# Altium PCB TOP.PcbDoc
Units mil, origin at the board's own origin, x right, y up, seen from the top; angles counter-clockwise.
Board outline 6000 x 4000 mil, 2 copper layers (Top Layer, Bottom Layer); 74 components, 73 nets, 468 pads, 20 vias.
Unrouted connection lines stored in the file: 230.
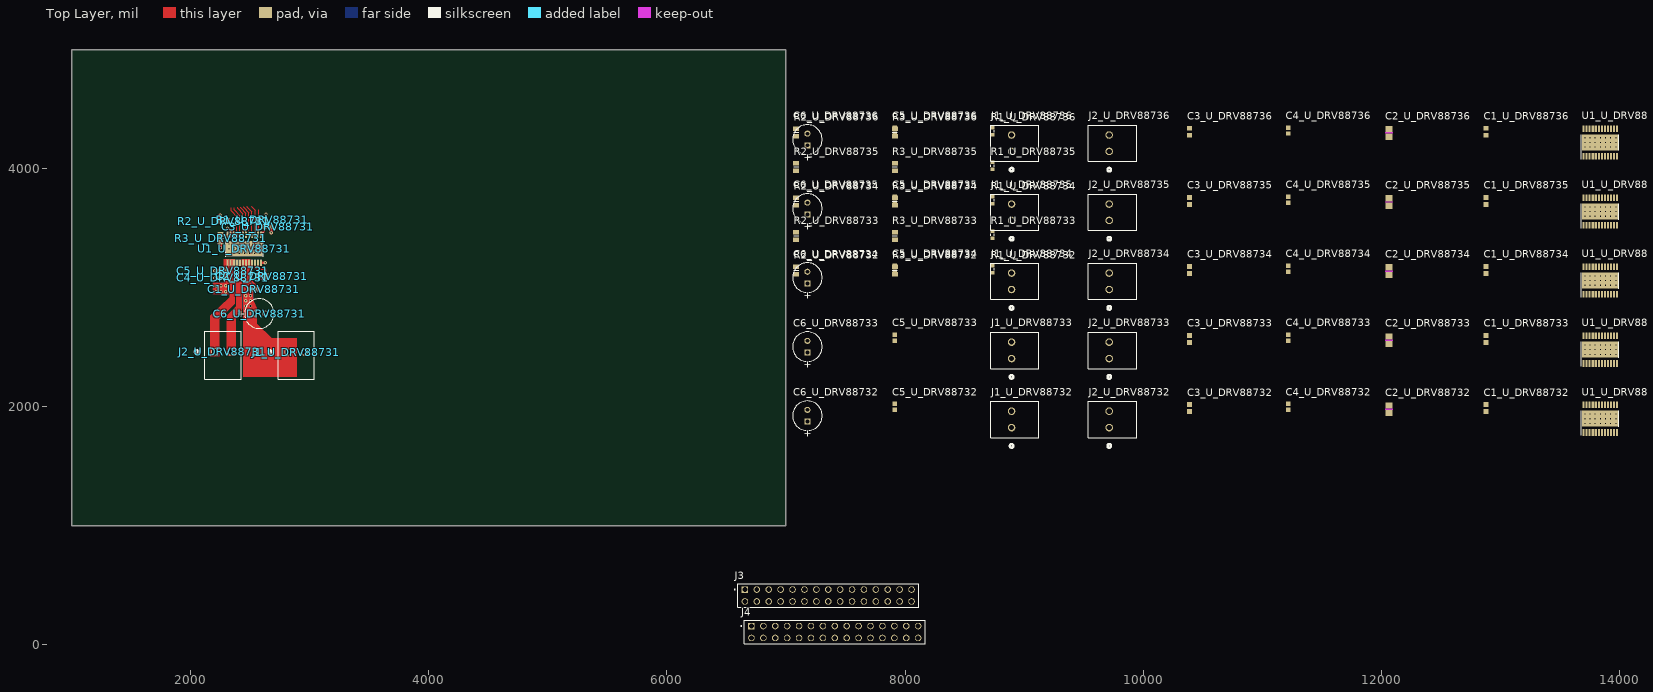
[diagram p0: Top Layer view]
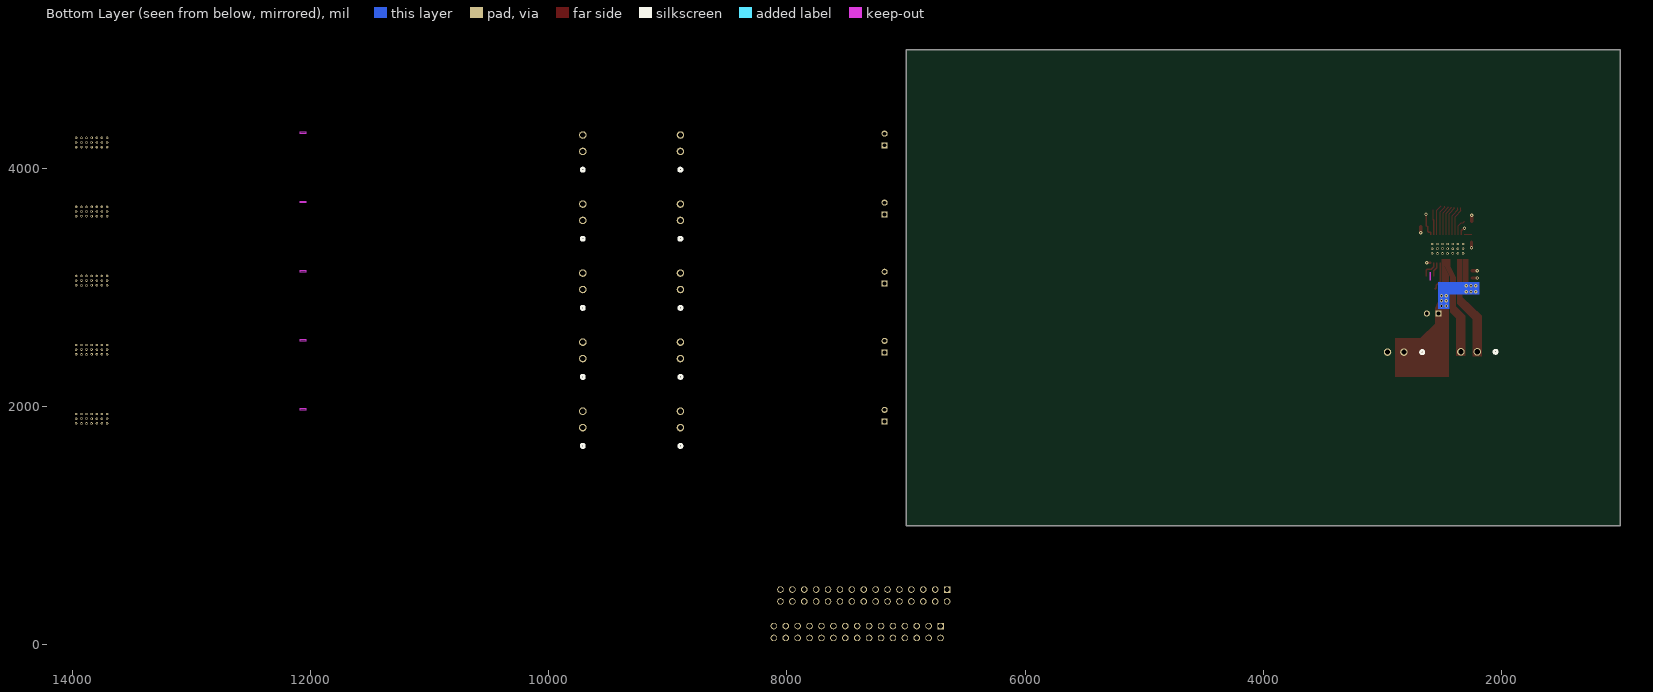
[diagram p1: Bottom Layer view, seen from below]

## Layer stack, top to bottom
Top Solder: solder mask 0.4, Solder Resist, Dk 3.5
Top Layer: signal copper 1.4
Dielectric 1: dielectric 12.6, FR-4, Dk 4.8
Bottom Layer: signal copper 1.4
Bottom Solder: solder mask 0.4, Solder Resist, Dk 3.5

## Board outline
1000,1000 7000,1000 7000,5000 1000,5000

## Design rules (kind name [scope] priority, off if disabled: settings)
Clearance [All] p1: gap=10 ignorepadtopadclearanceinfootprint=FALSE except(0: Arc-Hole Track-Hole SMDPad-Hole THPad-Hole Via-Hole Fill-Hole Poly-Hole Region-Hole Text-Hole)
PolygonConnect [All] p1: connectstyle=Relief reliefconductorwidth=10 reliefentries=4 polygonreliefangle="90 Angle" airgapwidth=10
RoutingVias [All] p1: holewidth=28 width=50 viastyle="Through Hole" minholewidth=28 minwidth=50 maxholewidth=28 maxwidth=50
SolderMaskExpansion [All] p1: expansion=4 istentingtop=FALSE
Width [All] p1: maxlimit=100 minlimit=10 preferedwidth=10 bottomlayer_maxwidth=10 minimp=50.000000 maximp=50.000000 favimp=50.000000
30 further rules are at their usual default settings.

## Classes and differential pairs
component class "Room Definition1": C1_U_DRV88731 C2_U_DRV88731 C3_U_DRV88731 C4_U_DRV88731 C5_U_DRV88731 C6_U_DRV88731 J1_U_DRV88731 J2_U_DRV88731 U1_U_DRV88731
channel class DRV8873: U_DRV88731 U_DRV88732 U_DRV88733 U_DRV88734 U_DRV88735 U_DRV88736
net class IPROPI2[1..6]: IPROPI21 IPROPI22 IPROPI23 IPROPI24 IPROPI25 IPROPI26
net class IPROPI1[1..6]: IPROPI11 IPROPI12 IPROPI13 IPROPI14 IPROPI15 IPROPI16
net class IN2[1..6]: IN21 IN22 IN23 IN24 IN25 IN26
net class IN1[1..6]: IN11 IN12 IN13 IN14 IN15 IN16
net class DISABLE[1..6]: DISABLE1 DISABLE2 DISABLE3 DISABLE4 DISABLE5 DISABLE6
net class C\S\[1..6]: C\S\1 C\S\2 C\S\3 C\S\4 C\S\5 C\S\6
component class U_DRV88736: C1_U_DRV88736 C2_U_DRV88736 C3_U_DRV88736 C4_U_DRV88736 C5_U_DRV88736 C6_U_DRV88736 J1_U_DRV88736 J2_U_DRV88736 R1_U_DRV88736 R2_U_DRV88736 R3_U_DRV88736 U1_U_DRV88736
component class U_DRV88735: C1_U_DRV88735 C2_U_DRV88735 C3_U_DRV88735 C4_U_DRV88735 C5_U_DRV88735 C6_U_DRV88735 J1_U_DRV88735 J2_U_DRV88735 R1_U_DRV88735 R2_U_DRV88735 R3_U_DRV88735 U1_U_DRV88735
component class U_DRV88734: C1_U_DRV88734 C2_U_DRV88734 C3_U_DRV88734 C4_U_DRV88734 C5_U_DRV88734 C6_U_DRV88734 J1_U_DRV88734 J2_U_DRV88734 R1_U_DRV88734 R2_U_DRV88734 R3_U_DRV88734 U1_U_DRV88734
component class U_DRV88733: C1_U_DRV88733 C2_U_DRV88733 C3_U_DRV88733 C4_U_DRV88733 C5_U_DRV88733 C6_U_DRV88733 J1_U_DRV88733 J2_U_DRV88733 R1_U_DRV88733 R2_U_DRV88733 R3_U_DRV88733 U1_U_DRV88733
component class U_DRV88732: C1_U_DRV88732 C2_U_DRV88732 C3_U_DRV88732 C4_U_DRV88732 C5_U_DRV88732 C6_U_DRV88732 J1_U_DRV88732 J2_U_DRV88732 R1_U_DRV88732 R2_U_DRV88732 R3_U_DRV88732 U1_U_DRV88732
component class U_DRV88731: C1_U_DRV88731 C2_U_DRV88731 C3_U_DRV88731 C4_U_DRV88731 C5_U_DRV88731 C6_U_DRV88731 J1_U_DRV88731 J2_U_DRV88731 R1_U_DRV88731 R2_U_DRV88731 R3_U_DRV88731 U1_U_DRV88731
component class TOP: J3 J4

## Components (designator, comment, footprint, x,y, rotation, side; value= is the part's Value field where it differs from the comment)
C1_U_DRV88731 "Capacitor 1 uF +/- 10% 16 V 0603" CAPC1608X94X35NL15T15 2531.43,2987 r180 top value=1µF (schematic designator C1)
C1_U_DRV88732 "Capacitor 1 uF +/- 10% 16 V 0603" CAPC1608X94X35NL15T15 12880,1990 r90 top value=1µF (schematic designator C1)
C1_U_DRV88733 "Capacitor 1 uF +/- 10% 16 V 0603" CAPC1608X94X35NL15T15 12880,2570 r90 top value=1µF (schematic designator C1)
C1_U_DRV88734 "Capacitor 1 uF +/- 10% 16 V 0603" CAPC1608X94X35NL15T15 12880,3150 r90 top value=1µF (schematic designator C1)
C1_U_DRV88735 "Capacitor 1 uF +/- 10% 16 V 0603" CAPC1608X94X35NL15T15 12880,3730 r90 top value=1µF (schematic designator C1)
C1_U_DRV88736 "Capacitor 1 uF +/- 10% 16 V 0603" CAPC1608X94X35NL15T15 12880,4310 r90 top value=1µF (schematic designator C1)
C2_U_DRV88731 "47nF" CAPC220145_90N_KEM 2598.04,3097 r180 top (schematic designator C2)
C2_U_DRV88732 "47nF" CAPC220145_90N_KEM 12065,1980 r90 top (schematic designator C2)
C2_U_DRV88733 "47nF" CAPC220145_90N_KEM 12065,2560 r90 top (schematic designator C2)
C2_U_DRV88734 "47nF" CAPC220145_90N_KEM 12065,3140 r90 top (schematic designator C2)
C2_U_DRV88735 "47nF" CAPC220145_90N_KEM 12065,3720 r90 top (schematic designator C2)
C2_U_DRV88736 "47nF" CAPC220145_90N_KEM 12065,4300 r90 top (schematic designator C2)
C3_U_DRV88731 "Capacitor 1 uF +/- 10% 16 V 0603" CAPC1608X94X35NL15T15 2646.43,3512 r180 top value=1µF (schematic designator C3)
C3_U_DRV88732 "Capacitor 1 uF +/- 10% 16 V 0603" CAPC1608X94X35NL15T15 10390,1990 r90 top value=1µF (schematic designator C3)
C3_U_DRV88733 "Capacitor 1 uF +/- 10% 16 V 0603" CAPC1608X94X35NL15T15 10390,2570 r90 top value=1µF (schematic designator C3)
C3_U_DRV88734 "Capacitor 1 uF +/- 10% 16 V 0603" CAPC1608X94X35NL15T15 10390,3150 r90 top value=1µF (schematic designator C3)
C3_U_DRV88735 "Capacitor 1 uF +/- 10% 16 V 0603" CAPC1608X94X35NL15T15 10390,3730 r90 top value=1µF (schematic designator C3)
C3_U_DRV88736 "Capacitor 1 uF +/- 10% 16 V 0603" CAPC1608X94X35NL15T15 10390,4310 r90 top value=1µF (schematic designator C3)
C4_U_DRV88731 "Capacitor 100 nF +/-10% 50 V 0603" CAPC1608X90X40NL10T20 2271.43,3082 r0 top value=100nF (schematic designator C4)
C4_U_DRV88732 "Capacitor 100 nF +/-10% 50 V 0603" CAPC1608X90X40NL10T20 11220,2000 r90 top value=100nF (schematic designator C4)
C4_U_DRV88733 "Capacitor 100 nF +/-10% 50 V 0603" CAPC1608X90X40NL10T20 11220,2580 r90 top value=100nF (schematic designator C4)
C4_U_DRV88734 "Capacitor 100 nF +/-10% 50 V 0603" CAPC1608X90X40NL10T20 11220,3160 r90 top value=100nF (schematic designator C4)
C4_U_DRV88735 "Capacitor 100 nF +/-10% 50 V 0603" CAPC1608X90X40NL10T20 11220,3740 r90 top value=100nF (schematic designator C4)
C4_U_DRV88736 "Capacitor 100 nF +/-10% 50 V 0603" CAPC1608X90X40NL10T20 11220,4320 r90 top value=100nF (schematic designator C4)
C5_U_DRV88731 "Capacitor 100 nF +/-10% 50 V 0603" CAPC1608X90X40NL10T20 2271.43,3142 r0 top value=100nF (schematic designator C5)
C5_U_DRV88732 "Capacitor 100 nF +/-10% 50 V 0603" CAPC1608X90X40NL10T20 7915,2000 r90 top value=100nF (schematic designator C5)
C5_U_DRV88733 "Capacitor 100 nF +/-10% 50 V 0603" CAPC1608X90X40NL10T20 7915,2580 r90 top value=100nF (schematic designator C5)
C5_U_DRV88734 "Capacitor 100 nF +/-10% 50 V 0603" CAPC1608X90X40NL10T20 7915,3160 r90 top value=100nF (schematic designator C5)
C5_U_DRV88735 "Capacitor 100 nF +/-10% 50 V 0603" CAPC1608X90X40NL10T20 7915,3740 r90 top value=100nF (schematic designator C5)
C5_U_DRV88736 "Capacitor 100 nF +/-10% 50 V 0603" CAPC1608X90X40NL10T20 7915,4320 r90 top value=100nF (schematic designator C5)
C6_U_DRV88731 "ECA-1HM470" CAPPR55-250-1120X630X1220 2576.12,2783 r0 top value=47µF (schematic designator C6)
C6_U_DRV88732 "ECA-1HM470" CAPPR55-250-1120X630X1220 7180,1925 r90 top value=47µF (schematic designator C6)
C6_U_DRV88733 "ECA-1HM470" CAPPR55-250-1120X630X1220 7180,2505 r90 top value=47µF (schematic designator C6)
C6_U_DRV88734 "ECA-1HM470" CAPPR55-250-1120X630X1220 7180,3085 r90 top value=47µF (schematic designator C6)
C6_U_DRV88735 "ECA-1HM470" CAPPR55-250-1120X630X1220 7180,3665 r90 top value=47µF (schematic designator C6)
C6_U_DRV88736 "ECA-1HM470" CAPPR55-250-1120X630X1220 7180,4245 r90 top value=47µF (schematic designator C6)
J1_U_DRV88731 "1751099" CONN_1751099_PXC 2818.2,2459 r0 top (schematic designator J1)
J1_U_DRV88732 "1751099" CONN_1751099_PXC 8895,1825 r90 top (schematic designator J1)
J1_U_DRV88733 "1751099" CONN_1751099_PXC 8895,2405 r90 top (schematic designator J1)
J1_U_DRV88734 "1751099" CONN_1751099_PXC 8895,2985 r90 top (schematic designator J1)
J1_U_DRV88735 "1751099" CONN_1751099_PXC 8895,3565 r90 top (schematic designator J1)
J1_U_DRV88736 "1751099" CONN_1751099_PXC 8895,4145 r90 top (schematic designator J1)
J2_U_DRV88731 "1751099" CONN_1751099_PXC 2202.2,2462 r0 top (schematic designator J2)
J2_U_DRV88732 "1751099" CONN_1751099_PXC 9715,1825 r90 top (schematic designator J2)
J2_U_DRV88733 "1751099" CONN_1751099_PXC 9715,2405 r90 top (schematic designator J2)
J2_U_DRV88734 "1751099" CONN_1751099_PXC 9715,2985 r90 top (schematic designator J2)
J2_U_DRV88735 "1751099" CONN_1751099_PXC 9715,3565 r90 top (schematic designator J2)
J2_U_DRV88736 "1751099" CONN_1751099_PXC 9715,4145 r90 top (schematic designator J2)
J3 "SSW-115-01-S-D" SSW-115-01-S-D 6655,465 r180 top
J4 "SSW-115-01-S-D" SSW-115-01-S-D 6710,158.33 r180 top
R1_U_DRV88731 "" RESC0603L 2602,3572 r0 top (schematic designator R1)
R1_U_DRV88732 "" RESC0603L 8735,3155 r90 top (schematic designator R1)
R1_U_DRV88733 "" RESC0603L 8735,3445 r90 top (schematic designator R1)
R1_U_DRV88734 "" RESC0603L 8735,3735 r90 top (schematic designator R1)
R1_U_DRV88735 "" RESC0603L 8735,4025 r90 top (schematic designator R1)
R1_U_DRV88736 "" RESC0603L 8735,4315 r90 top (schematic designator R1)
R2_U_DRV88731 "ERJ-P06F2001V" RESC0805L 2279.5,3559 r0 top (schematic designator R2)
R2_U_DRV88732 "ERJ-P06F2001V" RESC0805L 7085,3145 r90 top (schematic designator R2)
R2_U_DRV88733 "ERJ-P06F2001V" RESC0805L 7085,3435 r90 top (schematic designator R2)
R2_U_DRV88734 "ERJ-P06F2001V" RESC0805L 7085,3725 r90 top (schematic designator R2)
R2_U_DRV88735 "ERJ-P06F2001V" RESC0805L 7085,4015 r90 top (schematic designator R2)
R2_U_DRV88736 "ERJ-P06F2001V" RESC0805L 7085,4305 r90 top (schematic designator R2)
R3_U_DRV88731 "ERJ-P06F2001V" RESC0805L 2251,3415.91 r90 top (schematic designator R3)
R3_U_DRV88732 "ERJ-P06F2001V" RESC0805L 7915,3145 r90 top (schematic designator R3)
R3_U_DRV88733 "ERJ-P06F2001V" RESC0805L 7915,3435 r90 top (schematic designator R3)
R3_U_DRV88734 "ERJ-P06F2001V" RESC0805L 7915,3725 r90 top (schematic designator R3)
R3_U_DRV88735 "ERJ-P06F2001V" RESC0805L 7915,4015 r90 top (schematic designator R3)
R3_U_DRV88736 "ERJ-P06F2001V" RESC0805L 7915,4305 r90 top (schematic designator R3)
U1_U_DRV88731 "DRV8873HPWPRQ1" PWP0024J_N 2451,3327.63 r270 top (schematic designator U1)
U1_U_DRV88732 "DRV8873HPWPRQ1" PWP0024J_N 13840,1900 r90 top (schematic designator U1)
U1_U_DRV88733 "DRV8873HPWPRQ1" PWP0024J_N 13840,2480 r90 top (schematic designator U1)
U1_U_DRV88734 "DRV8873HPWPRQ1" PWP0024J_N 13840,3060 r90 top (schematic designator U1)
U1_U_DRV88735 "DRV8873HPWPRQ1" PWP0024J_N 13840,3640 r90 top (schematic designator U1)
U1_U_DRV88736 "DRV8873HPWPRQ1" PWP0024J_N 13840,4220 r90 top (schematic designator U1)

## Footprints (in the part's own frame and the unit in brackets; to place one, negate y for a bottom-side part, rotate by r counter-clockwise, add the part's x,y. Pads: shape width x height; smd on the part's side, far side on the other; paste and mask are expansions set on the pad)
CAPC1608X90X40NL10T20 [mm] "Chip Capacitor, 2-Leads, Body 1.70x0.90mm, IPC Medium Density"
  rect 0.95x0.95 smd: 1(-0.625,0) 2(0.625,0)
  body extent -0.85,-0.45 0.85,0.45, height 0.9
CAPC1608X94X35NL15T15 [mm] "Chip Capacitor, 2-Leads, Body 1.75x0.96mm, IPC Medium Density"
  rect 1.05x1 smd: 1(-0.75,0) 2(0.75,0)
  body extent -0.87,-0.48 0.87,0.48, height 0.94
CAPC220145_90N_KEM [mm]
  rect 1.306x1.45 smd paste+0 mask+0: 1(-0.803,0) 2(0.803,0)
  Top Layer keep-out region: -0.099,-0.674 -0.099,0.674 0.099,0.674 0.099,-0.674
  Keep-Out Layer region: -0.099,-0.725 -0.099,0.725 0.099,0.725 0.099,-0.725
  body extent -1.1,-0.72 1.1,0.72, height 0.9
CAPPR55-250-1120X630X1220 [mm] "THD, 2-Leads, Dia 6.3mm, Pin Spacing 2.5mm"
  rect 1.3x1.3 hole 0.8: 1(-1.25,0)
  round 1.3 hole 0.8: 2(1.25,0)
  silkscreen extent -3.15,-3.15 3.15,3.15, body extent -3.15,-3.15 3.16,3.15, height 12.21
CONN_1751099_PXC [mil]
  round 63 / inner round 60 / far side round 63 hole 43 paste-31.5 mask+0: 1(0,0) 2(137.8,0)
  silkscreen extent -169,-229 222,174, body extent -80,-225 216,170, height 375
PWP0024J_N [mm]
  rect 1.4x0.45 smd paste+0 mask+0: 1(-2.95,3.575) 2(-2.95,2.925) 3(-2.95,2.275) 4(-2.95,1.625) 5(-2.95,0.975) 6(-2.95,0.325) 7(-2.95,-0.325) 8(-2.95,-0.975) 9(-2.95,-1.625) 10(-2.95,-2.275) 11(-2.95,-2.925) 12(-2.95,-3.575) 13(2.95,-3.575) 14(2.95,-2.925) 15(2.95,-2.275) 16(2.95,-1.625) 17(2.95,-0.975) 18(2.95,-0.325) 19(2.95,0.325) 20(2.95,0.975) 21(2.95,1.625) 22(2.95,2.275) 23(2.95,2.925) 24(2.95,3.575)
  rect 3.4x7.8 smd paste-3.887 mask-3.886: 25(0,0)
  round 0.5 / inner round 1.524 / far side round 0.5 hole 0.203 paste-0.25 mask+0: V(-1,3.3) V(-1,2.17) V(-1,1.1) V(-1,0) V(-1,-1.1) V(-1,-2.17) V(-1,-3.3) V(0,3.3) V(0,2.17) V(0,1.1) V(0,0) V(0,-1.1) V(0,-2.17) V(0,-3.3) V(1,3.3) V(1,2.17) V(1,1.1) V(1,0) V(1,-1.1) V(1,-2.17) V(1,-3.3)
  silkscreen extent -3.55,-3.95 1.7,4.05, body extent -3.2,-3.9 3.2,3.9, height 1.13
RESC0603L [mm]
  rect 0.7x0.9 smd: 1(-0.75,0) 2(0.75,0)
  silkscreen extent -0.2,-0.35 0.2,0.35, body extent -0.85,-0.4 0.85,0.4, height 0.56
RESC0805L [mm]
  rect 1x1.3 smd: 1(-0.8,0) 2(0.8,0)
  silkscreen extent 0,-0.55 0,0.55, body extent -1.15,-0.68 1.15,0.68, height 0.76
SSW-115-01-S-D [mm] "Samtec Inc. SSW-115-01-S-D"
  rect 1.39x1.39 / inner round 1.39 / far side rect 1.39x1.39 hole 1.04: 1(0,0)
  round 1.39 hole 1.04: 2(0,2.54) 3(-2.54,0) 4(-2.54,2.54) 5(-5.08,0) 6(-5.08,2.54) 7(-7.62,0) 8(-7.62,2.54) 9(-10.16,0) 10(-10.16,2.54) 11(-12.7,0) 12(-12.7,2.54) 13(-15.24,0) 14(-15.24,2.54) 15(-17.78,0) 16(-17.78,2.54) 17(-20.32,0) 18(-20.32,2.54) 19(-22.86,0) 20(-22.86,2.54) 21(-25.4,0) 22(-25.4,2.54) 23(-27.94,0) 24(-27.94,2.54) 25(-30.48,0) 26(-30.48,2.54) 27(-33.02,0) 28(-33.02,2.54) 29(-35.56,0) 30(-35.56,2.54)
  silkscreen extent -37.09,-1.21 2.27,3.75, body extent -37.08,-1.27 1.52,3.68, height 8.51

## Part data
C1_U_DRV88731 C1_U_DRV88732 C1_U_DRV88733 C1_U_DRV88734 C1_U_DRV88735 C1_U_DRV88736 C3_U_DRV88731 C3_U_DRV88732 C3_U_DRV88733 C3_U_DRV88734 C3_U_DRV88735 C3_U_DRV88736: library part CMP-001-00003-7, "Chip Capacitor, 1 uF, +/- 10%, 16 V, 0603 (1608 Metric)", Capacitor Type=Ceramic, Case/Package=0603, Max Operating Temperature=125°C, Min Operating Temperature=-55°C, Tolerance=10%, Voltage Rating=16V, Mounting Technology=SM, Pins=2, RoHS Compliant=True
C2_U_DRV88731 C2_U_DRV88732 C2_U_DRV88733 C2_U_DRV88734 C2_U_DRV88735 C2_U_DRV88736: library part CMP-001-00085-2, "No Description Available", Mfr_Name=Kemet, Design Item ID=C0805C473K5RACTU, Source=C0805C473K5RACTU.SchLib
C4_U_DRV88731 C4_U_DRV88732 C4_U_DRV88733 C4_U_DRV88734 C4_U_DRV88735 C4_U_DRV88736 C5_U_DRV88731 C5_U_DRV88732 C5_U_DRV88733 C5_U_DRV88734 C5_U_DRV88735 C5_U_DRV88736: library part CMP-001-00017-7, "Chip Capacitor, 100 nF, +/- 10%, 50 V, 0603 (1608 Metric)", Capacitor Type=Ceramic, Case/Package=0603, Max Operating Temperature=125°C, Min Operating Temperature=-55°C, Tolerance=10%, Voltage Rating=50V, Mounting Technology=SM, Pins=2, RoHS Compliant=True
C6_U_DRV88731 C6_U_DRV88732 C6_U_DRV88733 C6_U_DRV88734 C6_U_DRV88735 C6_U_DRV88736: library part CMP-001-00031-7, "Aluminum Electrolytic Capacitor, 47 uF, +/-20%, 50 V, -40 to 85 degC, 2-Pin THD, RoHS, Bulk", Capacitor Type=Electrolytic, Case/Package=Radial, Manufacturer=Panasonic, Max Operating Temperature=85°C, Min Operating Temperature=-40°C, Package Description="2-Pin Radial Lead, Dia 6.3 mm, Height 12.2 mm", Package Quantity=200, Package Reference=CAPPR55-250-1120X630X1220, Ripple Current=130mA, Tolerance=20%, Voltage Rating=50V, Datasheet URL=https://industrial.panasonic.com/cdbs/www-data/pdf/RDF0000/DMF0000COL72.pdf, Datasheet Version=Apr-16, Diameter=6.3mm, Lead Pitch=2.5mm, Manufacturer URL=http://www.panasonic.com/, Mounting Technology=TH, Packaging=Bulk, Pins=2, Ripple Current (AC)=130mA, RoHS Compliant=True
J1_U_DRV88731 J1_U_DRV88732 J1_U_DRV88733 J1_U_DRV88734 J1_U_DRV88735 J1_U_DRV88736 J2_U_DRV88731 J2_U_DRV88732 J2_U_DRV88733 J2_U_DRV88734 J2_U_DRV88735 J2_U_DRV88736: library part CMP-002-000007-1, "No Description Available", Mfr_Name="Phoenix Contact", Design Item ID=1751099, Digi-Key_Part_Number_1=277-5924-ND, RefDes=RefDes, Source=1751099.SchLib, Type=Type
J3 J4: library part CMPL-001-B539-A.1, "CONN RCPT 30POS 0.1 GOLD PCB", Color=Black, Manufacturer="Samtec Inc.", Supplier 1 Part Number=SAM1210-15-ND, Connector Type=Receptacle, Contact Finish=Gold, Contact Finish Thickness="30.0µin (0.76µm)", Contact Type=Forked, Manufacturer Part Number=SSW-115-01-S-D, Mounting Type="Through Hole", Number of Positions=30, Number of Positions Loaded=All, Number of Rows=2, Pitch="0.100\" (2.54mm)", RoHS Compliance=Yes, Row Spacing=-, Supplier 1=Digikey, Termination=Solder
R1_U_DRV88731 R1_U_DRV88732 R1_U_DRV88733 R1_U_DRV88734 R1_U_DRV88735 R1_U_DRV88736: library part CMPL-001-A004-A.5, "RES SMD 10K OHM 1% 1/10W 0603", Manufacturer="Vishay Dale", Manufacturer Part Number=CRCW060310K0FKEA, Operating Temperature="-55°C ~ 155°C", Package=0603, Power (Watts)="0.1W, 1/10W", Resistance=10k, Supplier 1 Part Number=541-10.0KHCT-ND, Temperature Coefficient=±100ppm/°C, Tolerance=±1%, Composition="Thick Film", Features="Automotive AEC-Q200", FUTEK Item #=GOD04653, RoHS Compliance=Yes, Supplier 1=Digikey
R2_U_DRV88731 R2_U_DRV88732 R2_U_DRV88733 R2_U_DRV88734 R2_U_DRV88735 R2_U_DRV88736 R3_U_DRV88731 R3_U_DRV88732 R3_U_DRV88733 R3_U_DRV88734 R3_U_DRV88735 R3_U_DRV88736: library part CMPL-001-A887-A.2, "RES SMD 2K OHM 1% 1/2W 0805", Manufacturer="Panasonic Electronic Components", Operating Temperature="-55°C ~ 155°C", Package=0805, Power (Watts)="0.5W, 1/2W", Resistance=2k, Supplier 1 Part Number=P16065CT-ND, Temperature Coefficient=±100ppm/°C, Tolerance=±1%, Composition="Thick Film", Features="Automotive AEC-Q200, Pulse Withstanding", Manufacturer Part Number=ERJ-P06F2001V, RoHS Compliant=Yes, Supplier 1=Digikey
U1_U_DRV88731 U1_U_DRV88732 U1_U_DRV88733 U1_U_DRV88734 U1_U_DRV88735 U1_U_DRV88736: library part CMP-002-000006-1, "No Description Available", Mfr_Name="Texas Instruments", Design Item ID=DRV8873HPWPRQ1, RefDes=RefDes, Source=DRV8873HPWPRQ1.SchLib, Type=TYPE

## Via types
v1: diameter 28, hole 14, Top Layer to Bottom Layer, 20 vias

## Nets (pads, with @x,y where several pads share a name; then routed paths per layer and width w, separated by ;. In a path a pad name is that pad's centre, name@x,y a point inside that pad or via, vN(x,y) a via of type N, cw(c..) or ccw(c..) an arc to the next point about the centre after c; other vN are vias at no path point)
3V3: C3_U_DRV88731.2 C3_U_DRV88732.2 C3_U_DRV88733.2 C3_U_DRV88734.2 C3_U_DRV88735.2 C3_U_DRV88736.2 J3.2 R1_U_DRV88731.2 R1_U_DRV88732.2 R1_U_DRV88733.2 R1_U_DRV88734.2 R1_U_DRV88735.2 R1_U_DRV88736.2 U1_U_DRV88731.1 U1_U_DRV88731.11 U1_U_DRV88732.1 U1_U_DRV88732.11 U1_U_DRV88733.1 U1_U_DRV88733.11 U1_U_DRV88734.1 U1_U_DRV88734.11 U1_U_DRV88735.1 U1_U_DRV88735.11 U1_U_DRV88736.1 U1_U_DRV88736.11 | length 261.8
  Top Layer w12: v1(2310,3499) 2314.07,3499 2335.11,3477.96 2335.11,3444.5 U1_U_DRV88731.11 ; U1_U_DRV88731.1 2591.75,3462.47 2594.61,3465.33 2607.92,3465.33 2616.91,3474.31 C3_U_DRV88731.2 C3_U_DRV88731.2@2621.43,3516.53 ; C3_U_DRV88731.2@2631.53,3516.53 R1_U_DRV88731.2 2631.76,3572.24 2631.76,3616.76 v1(2632,3617)
C\S\1: J3.10 U1_U_DRV88731.6 | length 254.6
  Top Layer w10: 2420,3678 2420,3670 2463.8,3626.2 U1_U_DRV88731.6 U1_U_DRV88731.6@2465.39,3445.36
C\S\2: J3.12 U1_U_DRV88732.6
C\S\3: J3.14 U1_U_DRV88733.6
C\S\4: J3.16 U1_U_DRV88734.6
C\S\5: J3.18 U1_U_DRV88735.6
C\S\6: J3.20 U1_U_DRV88736.6
DISABLE1: J3.1 U1_U_DRV88731.9 | length 250.8
  Top Layer w10: 2340,3672 2339,3671 2339,3646 2387.02,3597.98 U1_U_DRV88731.9 U1_U_DRV88731.9@2388.61,3445.36
DISABLE2: J3.3 U1_U_DRV88732.9
DISABLE3: J3.5 U1_U_DRV88733.9
DISABLE4: J3.7 U1_U_DRV88734.9
DISABLE5: J3.9 U1_U_DRV88735.9
DISABLE6: J3.11 U1_U_DRV88736.9
F\A\U\L\T\: J4.27 R1_U_DRV88731.1 R1_U_DRV88732.1 R1_U_DRV88733.1 R1_U_DRV88734.1 R1_U_DRV88735.1 R1_U_DRV88736.1 U1_U_DRV88731.2 U1_U_DRV88732.2 U1_U_DRV88733.2 U1_U_DRV88734.2 U1_U_DRV88735.2 U1_U_DRV88736.2 | length 213.1
  Top Layer w10: R1_U_DRV88731.1 2572.47,3653.47 2573,3654
  Top Layer w12: U1_U_DRV88731.2 2566.16,3565.68 R1_U_DRV88731.1
GND: C3_U_DRV88731.1 C3_U_DRV88732.1 C3_U_DRV88733.1 C3_U_DRV88734.1 C3_U_DRV88735.1 C3_U_DRV88736.1 C4_U_DRV88731.1 C4_U_DRV88732.1 C4_U_DRV88733.1 C4_U_DRV88734.1 C4_U_DRV88735.1 C4_U_DRV88736.1 C5_U_DRV88731.1 C5_U_DRV88732.1 C5_U_DRV88733.1 C5_U_DRV88734.1 C5_U_DRV88735.1 C5_U_DRV88736.1 C6_U_DRV88731.2 C6_U_DRV88732.2 C6_U_DRV88733.2 C6_U_DRV88734.2 C6_U_DRV88735.2 C6_U_DRV88736.2 J1_U_DRV88731.2 J1_U_DRV88732.2 J1_U_DRV88733.2 J1_U_DRV88734.2 J1_U_DRV88735.2 J1_U_DRV88736.2 J3.30 R2_U_DRV88731.1 R2_U_DRV88732.1 R2_U_DRV88733.1 R2_U_DRV88734.1 R2_U_DRV88735.1 R2_U_DRV88736.1 R3_U_DRV88731.1 R3_U_DRV88732.1 R3_U_DRV88733.1 R3_U_DRV88734.1 R3_U_DRV88735.1 R3_U_DRV88736.1 U1_U_DRV88731.16 U1_U_DRV88731.17 U1_U_DRV88731.24 U1_U_DRV88731.25 U1_U_DRV88732.16 U1_U_DRV88732.17 U1_U_DRV88732.24 U1_U_DRV88732.25 U1_U_DRV88733.16 U1_U_DRV88733.17 U1_U_DRV88733.24 U1_U_DRV88733.25 U1_U_DRV88734.16 U1_U_DRV88734.17 U1_U_DRV88734.24 U1_U_DRV88734.25 U1_U_DRV88735.16 U1_U_DRV88735.17 U1_U_DRV88735.24 U1_U_DRV88735.25 U1_U_DRV88736.16 U1_U_DRV88736.17 U1_U_DRV88736.24 U1_U_DRV88736.25 | length 271.1
  Top Layer w20: U1_U_DRV88731.24@2595.02,3210 2595.49,3210.47 v1(2625.37,3210.47)
  Top Layer w28: v1(2201.91,3082) C4_U_DRV88731.1 ; v1(2201.91,3142) C5_U_DRV88731.1 ; v1(2247.5,3610) 2247.5,3559.5 R2_U_DRV88731.1 ; v1(2251,3335.91) R3_U_DRV88731.1 ; v1(2675.96,3461) C3_U_DRV88731.1
IN11: J4.1 U1_U_DRV88731.7 | length 252.8
  Top Layer w10: 2394,3676 2394,3667 2438.2,3622.8 U1_U_DRV88731.7 U1_U_DRV88731.7@2439.8,3445.36
IN12: J4.3 U1_U_DRV88732.7
IN13: J4.5 U1_U_DRV88733.7
IN14: J4.7 U1_U_DRV88734.7
IN15: J4.9 U1_U_DRV88735.7
IN16: J4.11 U1_U_DRV88736.7
IN21: J4.2 U1_U_DRV88731.8 | length 247
  Top Layer w10: 2365,3671 2365,3654 2412.61,3606.39 U1_U_DRV88731.8
IN22: J4.4 U1_U_DRV88732.8
IN23: J4.6 U1_U_DRV88733.8
IN24: J4.8 U1_U_DRV88734.8
IN25: J4.10 U1_U_DRV88735.8
IN26: J4.12 U1_U_DRV88736.8
IPROPI11: J4.13 R2_U_DRV88731.2 U1_U_DRV88731.10 | length 144.4
  Top Layer w10: R2_U_DRV88731.2 2311,3555.94 2325.69,3541.26 2339.74,3541.26 2361.43,3519.57 U1_U_DRV88731.10
IPROPI12: J4.15 R2_U_DRV88732.2 U1_U_DRV88732.10
IPROPI13: J4.17 R2_U_DRV88733.2 U1_U_DRV88733.10
IPROPI14: J4.19 R2_U_DRV88734.2 U1_U_DRV88734.10
IPROPI15: J4.21 R2_U_DRV88735.2 U1_U_DRV88735.10
IPROPI16: J4.23 R2_U_DRV88736.2 U1_U_DRV88736.10
IPROPI21: J4.14 R3_U_DRV88731.2 U1_U_DRV88731.12 | length 60.8
  Top Layer w10: R3_U_DRV88731.2 2254.63,3443.77 U1_U_DRV88731.12
IPROPI22: J4.16 R3_U_DRV88732.2 U1_U_DRV88732.12
IPROPI23: J4.18 R3_U_DRV88733.2 U1_U_DRV88733.12
IPROPI24: J4.20 R3_U_DRV88734.2 U1_U_DRV88734.12
IPROPI25: J4.22 R3_U_DRV88735.2 U1_U_DRV88735.12
IPROPI26: J4.24 R3_U_DRV88736.2 U1_U_DRV88736.12
MISO: J3.4 U1_U_DRV88731.3 U1_U_DRV88732.3 U1_U_DRV88733.3 U1_U_DRV88734.3 U1_U_DRV88735.3 U1_U_DRV88736.3 | length 251.9
  Top Layer w10: 2510,3683 2540.57,3652.43 U1_U_DRV88731.3
MOSI: J3.6 U1_U_DRV88731.4 U1_U_DRV88732.4 U1_U_DRV88733.4 U1_U_DRV88734.4 U1_U_DRV88735.4 U1_U_DRV88736.4 | length 260
  Top Layer w10: 2475,3685 2475,3677 2514.98,3637.02 U1_U_DRV88731.4 U1_U_DRV88731.4@2516.57,3445.36
NetC1_U_DRV88731_1: C1_U_DRV88731.1 U1_U_DRV88731.21 | length 244.1
  Top Layer w12: U1_U_DRV88731.21 2514.98,3053.93 2546.29,3022.61 2546.29,3000.69 2559.98,2987 C1_U_DRV88731.1
NetC1_U_DRV88732_1: C1_U_DRV88732.1 U1_U_DRV88732.21
NetC1_U_DRV88733_1: C1_U_DRV88733.1 U1_U_DRV88733.21
NetC1_U_DRV88734_1: C1_U_DRV88734.1 U1_U_DRV88734.21
NetC1_U_DRV88735_1: C1_U_DRV88735.1 U1_U_DRV88735.21
NetC1_U_DRV88736_1: C1_U_DRV88736.1 U1_U_DRV88736.21
NetC2_U_DRV88731_1: C2_U_DRV88731.1 U1_U_DRV88731.23 | length 160.2
  Top Layer w12: U1_U_DRV88731.23 2566.89,3210.76 2566.89,3177.3 2589.46,3154.74 2622.62,3154.74 2629.65,3147.71 C2_U_DRV88731.1
NetC2_U_DRV88731_2: C2_U_DRV88731.2 U1_U_DRV88731.22 | length 125.2
  Top Layer w12: U1_U_DRV88731.22 2541.3,3210.76 2541.3,3168.68 2566.43,3143.54 C2_U_DRV88731.2
NetC2_U_DRV88732_1: C2_U_DRV88732.1 U1_U_DRV88732.23
NetC2_U_DRV88732_2: C2_U_DRV88732.2 U1_U_DRV88732.22
NetC2_U_DRV88733_1: C2_U_DRV88733.1 U1_U_DRV88733.23
NetC2_U_DRV88733_2: C2_U_DRV88733.2 U1_U_DRV88733.22
NetC2_U_DRV88734_1: C2_U_DRV88734.1 U1_U_DRV88734.23
NetC2_U_DRV88734_2: C2_U_DRV88734.2 U1_U_DRV88734.22
NetC2_U_DRV88735_1: C2_U_DRV88735.1 U1_U_DRV88735.23
NetC2_U_DRV88735_2: C2_U_DRV88735.2 U1_U_DRV88735.22
NetC2_U_DRV88736_1: C2_U_DRV88736.1 U1_U_DRV88736.23
NetC2_U_DRV88736_2: C2_U_DRV88736.2 U1_U_DRV88736.22
OUT1_U_DRV88731: J2_U_DRV88731.2 U1_U_DRV88731.18 U1_U_DRV88731.19
OUT1_U_DRV88732: J2_U_DRV88732.2 U1_U_DRV88732.18 U1_U_DRV88732.19
OUT1_U_DRV88733: J2_U_DRV88733.2 U1_U_DRV88733.18 U1_U_DRV88733.19
OUT1_U_DRV88734: J2_U_DRV88734.2 U1_U_DRV88734.18 U1_U_DRV88734.19
OUT1_U_DRV88735: J2_U_DRV88735.2 U1_U_DRV88735.18 U1_U_DRV88735.19
OUT1_U_DRV88736: J2_U_DRV88736.2 U1_U_DRV88736.18 U1_U_DRV88736.19
OUT2_U_DRV88731: J2_U_DRV88731.1 U1_U_DRV88731.14 U1_U_DRV88731.15
OUT2_U_DRV88732: J2_U_DRV88732.1 U1_U_DRV88732.14 U1_U_DRV88732.15
OUT2_U_DRV88733: J2_U_DRV88733.1 U1_U_DRV88733.14 U1_U_DRV88733.15
OUT2_U_DRV88734: J2_U_DRV88734.1 U1_U_DRV88734.14 U1_U_DRV88734.15
OUT2_U_DRV88735: J2_U_DRV88735.1 U1_U_DRV88735.14 U1_U_DRV88735.15
OUT2_U_DRV88736: J2_U_DRV88736.1 U1_U_DRV88736.14 U1_U_DRV88736.15
SCLK: J3.8 U1_U_DRV88731.5 U1_U_DRV88732.5 U1_U_DRV88733.5 U1_U_DRV88734.5 U1_U_DRV88735.5 U1_U_DRV88736.5 | length 255
  Top Layer w10: 2447,3679 2447,3674 2489.39,3631.61 U1_U_DRV88731.5 U1_U_DRV88731.5@2490.98,3445.36
VM: C1_U_DRV88731.2 C1_U_DRV88732.2 C1_U_DRV88733.2 C1_U_DRV88734.2 C1_U_DRV88735.2 C1_U_DRV88736.2 C4_U_DRV88731.2 C4_U_DRV88732.2 C4_U_DRV88733.2 C4_U_DRV88734.2 C4_U_DRV88735.2 C4_U_DRV88736.2 C5_U_DRV88731.2 C5_U_DRV88732.2 C5_U_DRV88733.2 C5_U_DRV88734.2 C5_U_DRV88735.2 C5_U_DRV88736.2 C6_U_DRV88731.1 C6_U_DRV88732.1 C6_U_DRV88733.1 C6_U_DRV88734.1 C6_U_DRV88735.1 C6_U_DRV88736.1 J1_U_DRV88731.1 J1_U_DRV88732.1 J1_U_DRV88733.1 J1_U_DRV88734.1 J1_U_DRV88735.1 J1_U_DRV88736.1 U1_U_DRV88731.13 U1_U_DRV88731.20 U1_U_DRV88732.13 U1_U_DRV88732.20 U1_U_DRV88733.13 U1_U_DRV88733.20 U1_U_DRV88734.13 U1_U_DRV88734.20 U1_U_DRV88735.13 U1_U_DRV88735.20 U1_U_DRV88736.13 U1_U_DRV88736.20
  other v1: 2462.91,2847 2502.91,2847 2462.91,2890 2502.91,2890 2462.91,2933 2502.91,2933 2214.91,2967 2254.91,2967 2294.91,2967 2214.91,3016 2254.91,3016 2294.91,3016
pads on no net: J3.13 J3.15 J3.17 J3.19 J3.21 J3.22 J3.23 J3.24 J3.25 J3.26 J3.27 J3.28 J3.29 J4.25 J4.26 J4.28 J4.29 J4.30 U1_U_DRV88731.V U1_U_DRV88732.V U1_U_DRV88733.V U1_U_DRV88734.V U1_U_DRV88735.V U1_U_DRV88736.V

## Other copper
Top Layer:
  region net OUT1_U_DRV88731: 2473.36,3239.31 2473.36,3183 2428.38,3086 2428.38,2792.38 2379,2743 2379,2427 2301,2427 2301,2764.62 2381.94,2845.56 2381.94,3086 2429.29,3180.29 2429.29,3239.31
  region net OUT2_U_DRV88731: 2371,3239.31 2371,2866 2241,2736 2241,2426 2163.12,2426 2163.12,2766 2326.93,2921.93 2326.93,3239.31
  region net VM: 2498.91,3239.71 2498.91,3054.24 ccw(c2521.22,3054.24) 2505.44,3038.46 2523.05,3020.85 2523.05,2928.97 ccw(c2637.04,2928.97) 2531.22,2886.6 2555.58,2825.79 2555.58,2698.42 2679.77,2574.23 2893,2574.23 2893,2252 2555.58,2252 2442.91,2252 2442.91,3100.95 2479.91,3180.84 2479.91,3239.71
  region net VM: 2318.91,3239 2318.91,2945 2190.91,2945 2190.91,3041.58 2276.91,3041.58 2276.91,3239
Bottom Layer:
  region net VM: 2187.36,3045 2528.64,3045 2528.64,2824 2435.36,2824 2435.36,2944 2187.36,2944

## Text inside footprints (layer, text, board x,y; h text height)
C6_U_DRV88731: Top Overlay "+" at 2391.09,2753.47 h59.06
C6_U_DRV88732: Top Overlay "+" at 7209.53,1739.97 h59.06 r90
C6_U_DRV88733: Top Overlay "+" at 7209.53,2319.97 h59.06 r90
C6_U_DRV88734: Top Overlay "+" at 7209.53,2899.97 h59.06 r90
C6_U_DRV88735: Top Overlay "+" at 7209.53,3479.97 h59.06 r90
C6_U_DRV88736: Top Overlay "+" at 7209.53,4059.97 h59.06 r90